# Altium PCB 28pins_PCB.PcbDoc (part 3 of 3)
Units mm, origin at the board's own origin, x right, y up, seen from the top; angles counter-clockwise.
Board outline 68.58 x 53.34 mm, 2 copper layers (L1, L2), stack 1.671 mm thick; 105 components, 73 nets, 323 pads, 83 vias.
Unrouted connection lines stored in the file: 1.
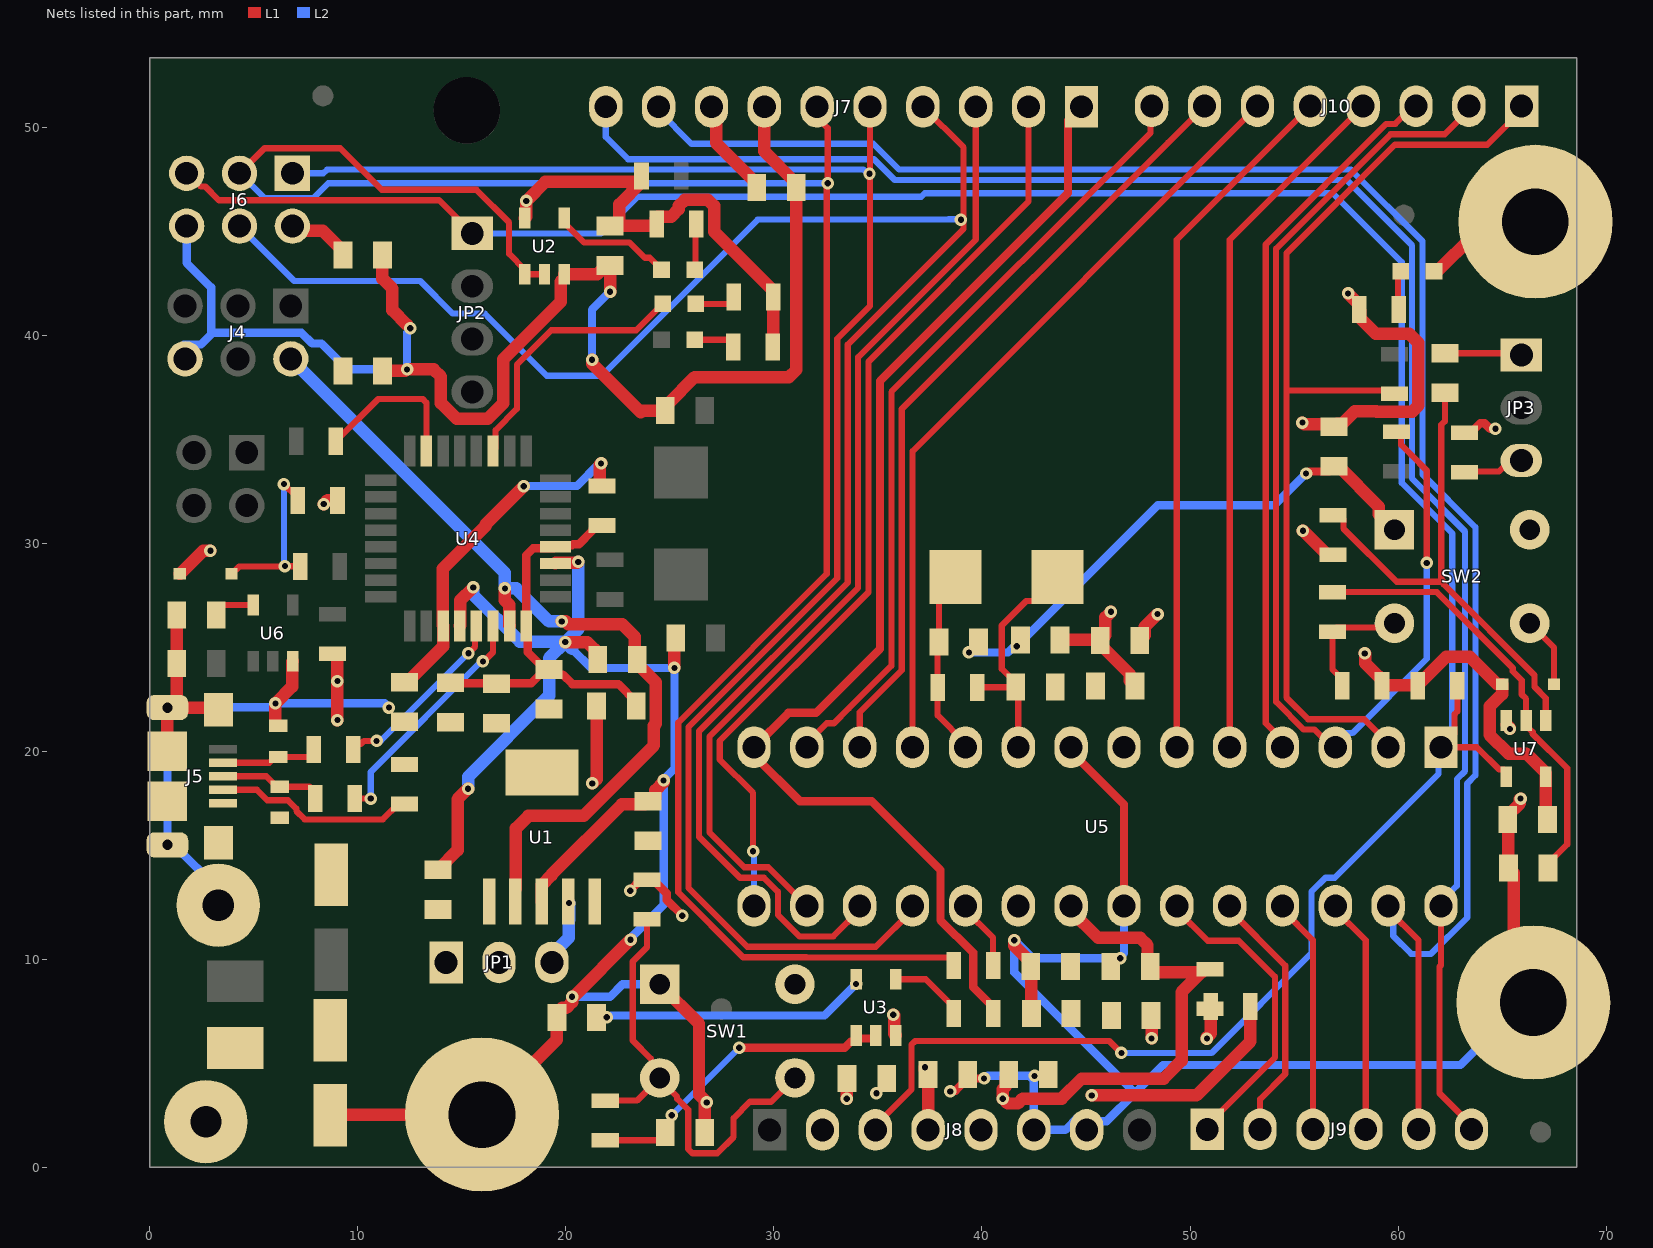
[diagram p2: the nets of this part, all layers, seen from the top]

## Via types
v1: diameter 0.6, hole 0.3, L1 to L2, 83 vias

## Nets (pads, with @x,y where several pads share a name; then routed paths per layer and width w, separated by ;. In a path a pad name is that pad's centre, name@x,y a point inside that pad or via, vN(x,y) a via of type N, cw(c..) or ccw(c..) an arc to the next point about the centre after c; other vN are vias at no path point) (continued)
16U_SCLK_R: R12.1 U4.15 | length 7.6
  L1 w0.3: R12.1@8.951,34.9 10.983,36.932 13.124,36.932 13.3,36.756 U4.15@13.3,34.425
16U_TX_LED: D2.1 U4.11 | length 12.8
  L1 w0.3: U4.11@16.5,34.425 16.625,34.55 16.625,35.437 17.65,36.462 17.65,38.58 19.304,40.234 23.384,40.234 D2.1@24.65,41.5
328P_16MHz_XTAL1: C29.2 R23.1 U5.9 Y2.1 | length 11.7
  L1 w0.3: R23.1@39.765,23.075 41.606,23.075 C29.2@41.62,23.089 ; U5.9@41.745,20.193 41.745,22.964 C29.2@41.62,23.089 ; Y2.1@43.623,28.372 43.623,28.322 42.523,27.222 42.127,27.222 40.95,26.045 40.95,23.959 41.62,23.289 C29.2@41.62,23.089
328P_16MHz_XTAL2: C28.2 R23.2 U5.10 Y2.2 | length 9.1
  L1 w0.3: Y2.2@38.723,28.372 37.937,27.586 C28.2@37.937,25.248 37.865,25.176 R23.2@37.865,23.075 37.865,21.733 39.205,20.393 U5.10@39.205,20.193
328P_AUTORESETn: C14.2 R25.2 U7.1 | length 24.9
  L1 w0.3: R25.2@56.875,31.35 57.175,31.35 57.375,31.15 57.375,30.705 59.93,28.15 62.067,28.15 62.195,28.022 ; C14.2@62.25,37.225 62.25,35.866 62.075,35.691 62.075,28.27 62.195,28.15 62.195,28.022 ; U7.1@67.1,21.475 67.1,22.554 66.553,23.1 66.553,23.663 62.195,28.022
328P_BUF_RESETn: C33.2 R28.2 U7.2 | length 21.2
  L1 w0.3: R28.2@56.85,27.65 61.86,27.65 65.507,24.003 65.507,23.851 65.938,23.419 65.938,22.728 66.15,22.516 66.15,21.25 66.475,20.925 66.475,20.83 68.123,19.182 68.123,15.523 67.2,14.6 C33.2@67.2,14.4
328P_RESETn: J6.5 J8.3 JP2.1 R22.2 U5.1 U7.4 | length 131.7
  L1 w0.3: 2.438,47.168 2.464,47.142 2.667,47.142 3.327,46.482 13.908,46.482 JP2.1@15.5,44.89 ; J8.3@34.874,1.803 34.874,2.003 36.611,3.74 36.611,5.899 36.787,6.075 46.125,6.075 v1(46.7,5.5) ; R22.2@62.85,23.15 62.85,21.914 62.715,21.779 62.715,20.843 U5.1@62.065,20.193 63.782,20.193 64.85,19.125 65.075,19.125 65.2,19 U7.4@65.2,18.775
  L2 w0.3: JP2.1@15.5,44.89 21.679,44.89 23.444,46.655 37.077,46.655 37.246,46.825 56.858,46.825 60.171,43.512 60.171,32.899 62.6,30.47 62.6,20.728 U5.1@62.065,20.193 ; v1(46.7,5.5) 51.037,5.5 55.835,10.298 55.835,13.249 56.509,13.923 56.951,13.923 60.728,17.7 61.946,18.919 61.946,19.939 U5.1@62.2,20.193
+3V3: C3.2 C23.2 J8.4 JP1.3 R8.2 U1.4 U1.5 | length 16.6
  L1 w0.6: v1(37.261,4.815) 37.261,4.698 37.413,4.546 37.413,1.805 J8.4@37.414,1.803 ; v1(45.275,3.462) 50.308,3.462 52.9,6.054 R8.2@52.9,7.725
  L2 w0.6: JP1.3@19.33,9.85 19.33,10.23 20.135,11.035 20.135,11.885 20.155,11.905 v1(20.155,12.705)
+3V3_16U2_UCAP: C13.2 R10.1 U4.27 | length 17.3
  L1 w0.6: C13.2@12.249,23.314 12.449,23.314 12.599,23.464 12.599,23.535 14.1,25.036 U4.27@14.1,26.025 14.075,26.05 14.075,26.686 14.075,28.761 16.15,30.836 16.15,30.907 v1(17.983,32.741) ; v1(21.692,33.833) 21.63,33.771 21.63,32.801 21.68,32.751 R10.1@21.742,32.751
  L2 w0.4: v1(17.983,32.741) 17.992,32.75 20.538,32.75 21.582,33.795 21.653,33.795 v1(21.692,33.833)
+5V: C4.2 C9.2 C10.2 C12.1 C21.2 C27.2 J2.1 J4.2 J8.5 JP1.1 L1.2 R7.1 U1.1 U1.2 U4.31 U5.21 | length 65.4
  L1 w0.6: J2.1@2.504,2.229 J2.1@2.504,2.53 ; v1(17.075,27.825) 17.075,27.248 17.275,27.048 17.275,26.686 17.275,26.05 U4.31@17.3,26.025 ; U1.2@17.6,13.4 17.6,16.3 18.2,16.9 20.85,16.9 24.228,20.278 24.228,21.217 24.328,21.317 24.328,23.31 23.305,24.334 23.305,25.514 22.708,26.111 20.12,26.111 19.993,26.238 v1(19.8,26.238) ; C21.2@41.286,4.465 41.136,4.315 41.136,3.9 41,3.764 v1(41,3.3) 41.228,3.072 41.725,3.072 41.956,3.303 43.831,3.303 44.79,4.262 48.725,4.262 49.6,5.137 49.6,8.43 50.558,9.388 48.242,9.388 48.092,9.538 C27.2@48.092,9.648 47.955,9.785 47.955,10.684 47.601,11.038 45.582,11.038 44.285,12.335 U5.21@44.285,12.573
  L2 w0.6: J4.2@6.782,38.862 17.075,28.569 v1(17.075,27.825) 17.616,27.825 19.202,26.238 v1(19.8,26.238)
+5V/3V3: C2.2 C17.2 C22.2 C24.2 C31.2 D5.1 D6.1 FB1.1 FB2.1 FB3.1 J6.2 J8.2 JP1.2 R1.2 R2.1 R5.2 R6.2 R7.2 R8.1 R9.2 R11.1 R20.2 R22.1 R24.1 R25.1 R26.1 U2.5 U7.5 | length 78.8
  L1 w0.4: v1(23.1,13.298) 23.1,13.325 23.6,13.825 R2.1@23.9,13.825 24.2,13.825 24.85,13.175 24.85,12.85 v1(25.6,12.1)
  L1 w0.6: D5.1@1.448,28.524 1.46,28.524 2.578,29.642 v1(2.921,29.642) ; J6.2@6.858,45.237 7.077,45.019 8.308,45.019 9.286,44.04 C17.2@9.286,43.84 ; v1(8.365,31.882) 8.548,32.065 8.88,32.065 R24.1@8.915,32.029 ; R11.1@8.788,24.679 9.088,24.679 9.025,24.615 v1(9.025,23.375) v1(9.025,21.5) ; U2.5@18.025,45.625 18.1,45.7 v1(18.1,46.45) 19.021,47.371 23.487,47.371 R9.2@23.637,47.521 ; v1(21.272,18.453) 21.478,18.66 FB1.1@21.478,22.174 ; C2.2@22.125,45.25 C2.2@22.325,45.25 ; R9.2@23.637,47.65 R9.2@23.637,47.521 ; R1.2@24.275,45.15 24.275,45.25 22.575,45.25 C2.2@22.325,45.25 ; R1.2@24.325,45.15 24.325,45.6 24.425,45.7 25.074,45.7 25.425,46.051 25.425,46.207 25.718,46.5 26.832,46.5 27.125,46.207 27.125,44.975 29.925,42.175 29.925,41.875 R5.2@29.975,41.825 29.963,41.812 29.963,39.438 R6.2@29.95,39.425 ; v1(33.5,3.3) 33.509,3.309 33.509,4.258 C22.2@33.518,4.267 ; FB2.1@47.584,25.324 47.834,25.574 47.834,25.99 v1(48.438,26.594) ; FB3.1@48.125,7.3 48.15,7.275 v1(48.15,6.2) ; v1(50.809,6.191) 50.809,6.245 51,6.437 R8.1@51,7.725 ; v1(55.4,35.8) 55.484,35.716 56.809,35.716 C24.2@56.925,35.6 57.075,35.75 57.315,35.75 57.918,36.352 58.941,36.352 58.968,36.325 60.682,36.325 60.975,36.618 60.975,39.632 60.532,40.075 58.923,40.075 58.175,40.823 58.175,41.175 R20.2@58.125,41.225 58.125,41.525 58.075,41.575 58.023,41.575 v1(57.597,42.001) ; v1(55.423,30.602) 56.575,29.45 R25.1@56.875,29.45 ; v1(58.4,24.7) 58.412,24.688 58.412,24.239 59.051,23.6 59.075,23.6 59.225,23.45 R26.1@59.225,23.15 59.238,23.163 R22.1@60.937,23.163 ; R22.1@60.95,23.15 R22.1@60.937,23.163 ; D6.1@64.993,23.225 64.993,22.75 64.4,22.157 64.4,20.793 65.309,19.884 66.166,19.884 67.1,18.95 67.1,16.8 C31.2@67.175,16.725 ; D6.1@65.006,23.225 64.757,23.225 63.432,24.55 62.324,24.55 R22.1@60.937,23.163 ; C2.2@22.325,45.25 22.575,45.5 22.575,46.288 23.637,47.35 R9.2@23.637,47.521
+5V/3V3_16U2: C6.2 C7.2 C8.2 FB1.2 R10.2 U4.4 U4.32 | length 20
  L1 w0.4: C8.2@14.449,23.289 14.47,23.268 16.642,23.268 C7.2@16.663,23.247 16.691,23.275 18.342,23.275 19,23.933 18.175,24.758 18.175,25.95 U4.32@18.1,26.025 18.1,29.425 18.425,29.75 19.425,29.75 19.575,29.9 20.3,29.9 20.35,29.95 20.633,29.95 21.292,30.609 21.292,30.701 21.442,30.851 R10.2@21.742,30.851 ; C6.2@19.2,23.933 19.45,23.683 19.853,23.683 20.311,23.224 22.528,23.224 23.378,22.374 FB1.2@23.378,22.174
+5V/3V3_328P_AVCC: C25.2 C26.2 FB3.2 U5.20
+5V/3V3_328P_VCC: C19.2 C20.2 FB2.2 U5.7 | length 6.6
  L1 w0.6: C19.2@43.749,25.349 45.659,25.349 FB2.2@45.684,25.324 ; v1(46.2,26.7) 45.934,26.434 45.934,25.574 FB2.2@45.684,25.324 ; C20.2@47.356,22.939 C20.2@47.356,23.139 47.106,23.389 47.106,23.702 45.684,25.124 FB2.2@45.684,25.324
+AREF: C18.2 J7.8 | length 4.8
  L1 w0.6: J7.8@27,50.978 27.224,50.754 27.224,49.242 29.174,47.292 C18.2@29.174,47.092
AD0: J9.1 U5.23 | length 14.9
  L1 w0.3: U5.23@49.365,12.573 49.365,12.373 50.846,10.892 52.345,10.892 54.077,9.16 54.077,5.28 50.825,2.029 J9.1@50.825,1.829
AD1: J9.2 U5.24 | length 12.4
  L1 w0.3: U5.24@51.905,12.573 51.905,12.373 54.577,9.701 54.577,4.49 53.365,3.279 J9.2@53.365,1.829
AD2: J9.3 U5.25 | length 11.3
  L1 w0.3: U5.25@54.445,12.573 54.445,12.373 55.905,10.913 J9.3@55.905,1.829
AD3: J9.4 U5.26 | length 11.3
  L1 w0.3: U5.26@56.985,12.573 56.985,12.373 58.445,10.913 J9.4@58.445,1.829
AD4/SDA: J7.9 J9.5 U5.27 | length 90.8
  L1 w0.3: U5.27@59.525,12.573 59.525,12.373 60.985,10.913 J9.5@60.985,1.829
  L2 w0.3: J7.9@24.46,50.978 24.46,50.778 26.038,49.2 34.772,49.2 36.017,47.955 57.73,47.955 61.171,44.514 61.171,33.313 63.715,30.77 63.715,18.841 63.325,18.451 63.325,12.007 61.58,10.262 60.63,10.262 59.768,11.123 59.768,12.33 U5.27@59.525,12.573
AD5/SCL: J7.10 J9.6 U5.28 | length 87
  L1 w0.3: U5.28@62.065,12.573 62.065,9.718 61.99,9.643 61.99,3.564 63.525,2.029 J9.6@63.525,1.829
  L2 w0.3: J7.10@21.92,50.978 21.92,49.528 22.993,48.455 34.81,48.455 35.81,47.455 57.523,47.455 60.671,44.307 60.671,33.106 63.215,30.563 63.215,19.048 62.825,18.658 62.825,13.533 62.065,12.773 U5.28@62.065,12.573
BUTTON_RESETn: D6.2 R26.2 R28.1 SW2.3 SW2.4 | length 9.3
  L1 w0.3: R26.2@57.325,23.15 57.325,23.45 56.85,23.925 R28.1@56.85,25.75 57.05,25.95 59.625,25.95 SW2.3@59.825,26.15 ; SW2.4@66.325,26.15 67.495,24.98 D6.2@67.495,23.225
CON_USB_N: J5.2 R13.1 Z2.2 | length 5
  L1 w0.3: J5.2@3.53,19.45 5.75,19.45 6.025,19.725 Z2.2@6.175,19.725 7.724,19.725 7.899,19.901 7.899,20.244 7.823,20.32 R13.1@7.823,20.345
CON_USB_P: J5.3 R15.1 Z1.2 | length 5
  L1 w0.3: J5.3@3.53,18.8 5.6,18.8 6.1,18.3 Z1.2@6.25,18.3 7.675,18.3 7.95,18.025 R15.1@7.95,17.725
GND: C1.1 C2.1 C3.1 C4.1 C5.1 C6.1 C7.1 C8.1 C9.1 C10.1 C11.2 C12.2 C13.1 C15.1 C16.1 C17.1 C18.1 C19.1 C20.1 C21.1 C22.1 C23.1 C24.1 C25.1 C26.1 C27.1 C28.1 C29.1 C30.1 C31.1 C32.1 C33.1 D4.1 J1.1 J4.6 J5.5 J5.6 J5.7 J5.8 J5.9 J5.10 J5.11 J6.6 J7.7 J8.6 J8.7 MH1.1 MH2.1 MH3.1 R14.2 R19.1 SW1.1 SW1.2 SW2.1 SW2.2 U1.3 U1.6 U2.3 U3.3 U4.3 U4.28 U5.8 U5.22 U6.3 U7.3 Z1.1 Z2.1 | length 306.1
  L1 w0.4: v1(38.475,3.65) 38.513,3.688 38.734,3.688 39.311,4.265 C23.1@39.311,4.465 39.502,4.275 v1(40.1,4.275) ; U5.8@44.285,20.193 44.285,19.993 46.825,17.453 U5.22@46.825,12.573 ; v1(55.575,33.35) 55.629,33.35 55.729,33.45 56.675,33.45 C24.1@56.925,33.7 ; R19.1@63.195,35.316 63.495,35.316 63.941,35.762 64.163,35.762 64.425,35.5 v1(64.675,35.5)
  L1 w0.6: J5.10@0.855,20 J5.8@0.855,22.1 J5.8@1.092,22.1 ; C30.1@1.3,26.55 C32.1@1.3,24.225 1.298,24.223 1.298,22.305 J5.8@1.092,22.1 ; J5.6@3.305,22 3.205,22.1 J5.8@1.092,22.1 ; Z2.1@6.175,21.225 6.045,21.355 v1(6.045,22.301) 6.85,23.106 6.85,24.3 U6.3@6.875,24.325 ; C12.2@8.675,2.5 8.715,2.54 MH1.1@15.97,2.54 19.573,6.143 C1.1@19.573,7.214 19.573,7.414 19.823,7.664 20.023,7.664 20.3,7.94 v1(20.3,8.2) 20.367,8.2 v1(23.114,10.947) ; C10.1@11.186,38.278 12.294,38.278 v1(12.37,38.354) 13.649,38.354 14,38.003 14,36.732 14.762,35.97 16.238,35.97 17,36.732 17,38.849 19.75,41.599 19.75,42.575 U2.3@19.9,42.725 ; C17.1@11.186,43.84 11.186,42.713 11.659,42.24 11.659,41.199 v1@12.37,40.488 ; C4.1@13.85,14.3 14.8,15.25 14.8,17.7 v1(15.3,18.2) ; U4.28@14.9,26.025 14.925,26.05 14.925,26.686 14.925,27.25 v1(15.55,27.875) ; U1.3@18.85,12.775 18.85,13.575 19.32,14.045 19.32,14.082 22.688,17.45 23.8,17.45 C3.1@23.95,17.6 ; U4.3@19.5,29.025 19.525,29.05 20.55,29.05 v1(20.6,29.1) ; U2.3@19.925,42.925 21.5,42.925 21.925,43.35 C2.1@22.125,43.35 v1(22.125,42.089) ; v1(19.975,25.25) 21.028,25.25 21.379,24.899 21.379,24.559 C9.1@21.529,24.409 ; v1(21.26,38.811) 21.26,38.633 23.597,36.297 23.673,36.373 C16.1@24.78,36.373 24.78,36.573 24.93,36.723 26.186,37.978 30.723,37.978 31.074,38.33 C18.1@31.074,47.092 31.074,47.292 29.54,48.826 J7.7@29.54,50.978 ; C3.1@24.15,17.6 24.3,17.75 24.3,18.119 24.7,18.519 v1(24.7,18.6) ; SW1.1@24.512,8.803 26.4,6.915 26.4,3.5 v1(26.775,3.125) 26.68,3.03 C5.1@26.68,1.676 ; v1(25.222,24.003) 25.222,25.385 C15.1@25.288,25.451 ; SW1.2@31.012,8.803 SW1.2@31.061,8.803 ; v1(35.738,7.341) 35.776,7.302 35.776,6.42 U3.3@35.85,6.346 ; v1(41.554,10.922) 41.554,10.646 42.35,9.85 C26.1@42.35,9.65 42.363,9.638 42.363,7.413 C25.1@42.375,7.4 ; C24.1@56.925,33.7 57.125,33.7 59.075,31.75 59.075,31.4 SW2.1@59.825,30.65 ; D4.1@61.825,43 63.688,44.863 65.529,44.863 MH2.1@66.04,45.374 ; U7.3@65.225,21.275 65.375,21.125 v1(65.375,21.072) ; v1(65.888,17.729) 65.849,17.691 65.849,17.499 65.275,16.925 C31.1@65.275,16.725 65.288,16.713 65.288,14.412 C33.1@65.3,14.4 65.55,14.15 65.55,8.456 MH3.1@66.04,7.966
  L2 w0.4: J4.6@1.651,39.532 1.671,39.552 2.468,39.552 2.952,40.036 ; J6.6@1.778,45.237 1.778,43.472 2.952,42.298 2.952,40.036 ; 2.883,39.967 2.952,40.036 ; J1.1@3.3,12.6 3.3,13.368 1.168,15.5 J5.9@0.855,15.5 J5.8@0.855,22.1 0.865,22.11 5.854,22.11 v1(6.045,22.301) 11.299,22.301 v1(11.5,22.1) ; v1(12.522,40.335) 12.522,40.281 12.37,40.129 v1(12.37,38.354) 9.5,38.354 8.255,39.599 7.813,39.599 7.3,40.112 3.028,40.112 2.952,40.036 ; MH1.1@15.763,2.332 MH1.1@15.97,2.54 ; v1(20.3,8.2) 22.123,8.2 22.726,8.803 SW1.1@24.512,8.803 ; 20.3,24.925 21.222,24.003 v1(25.222,24.003) 25.222,19.176 24.7,18.654 v1(24.7,18.6) 24.7,12.61 v1@22.936,10.846 ; v1(21.26,38.811) 21.26,41.224 v1(22.125,42.089) ; v1(39.375,24.75) 41.25,24.75 41.849,25.349 ; v1(40.1,4.275) 40.154,4.275 40.279,4.4 v1(42.525,4.4) ; v1(41.675,25.05) 48.45,31.825 54.05,31.825 v1(55.575,33.35) ; v1@42.397,4.272 42.494,4.174 J8.6@42.494,1.803 44.003,1.803 J8.7@44.619,2.419 ; U5.8@44.285,20.193 U5.8@44.285,20.714 ; J8.7@45.034,1.803 45.452,2.221 45.996,2.221 47.348,3.573 ; U5.22@46.711,12.687 U5.22@46.825,12.573 46.825,10.288 46.65,10.113 v1(46.65,10.058) 42.418,10.058 v1(41.554,10.922) 41.554,9.367 47.348,3.573 ; MH3.1@66.04,7.966 62.999,4.925 48.7,4.925 47.348,3.573 ; MH2.1@66.04,45.374 MH2.1@67.325,44.089
  L2 w0.6: v1(15.3,18.2) 15.3,18.775 19.2,22.675 19.2,24.475 v1(19.975,25.25) ; v1(15.55,27.875) 15.55,27.521 17.796,25.275 19.95,25.275 v1(19.975,25.25) ; 20.3,24.925 v1(19.975,25.25) ; v1(20.6,29.1) 20.6,25.875 v1(19.975,25.25)
  other v1: 34.925,3.567
IO0: J10.1 R16.2 U5.2 | length 47
  L1 w0.3: U5.2@59.525,20.193 59.525,20.393 58.375,21.543 55.673,21.543 54.635,22.581 54.635,37.338 ; R16.2@59.825,37.175 59.662,37.338 54.635,37.338 ; J10.1@65.938,51.003 65.938,50.803 64.288,49.153 59.847,49.153 54.635,43.942 54.635,37.338
IO1: J10.2 R18.2 U5.3 | length 56
  L1 w0.3: U5.3@56.71,20.668 56.684,20.642 56.384,20.642 55.983,21.043 55.466,21.043 54.135,22.373 54.135,44.149 59.639,49.653 62.239,49.653 63.201,50.616 63.398,50.813 J10.2@63.398,51.003 ; R18.2@59.925,35.35 59.944,35.35 60.144,35.15 60.144,34.726 60.622,34.247 61.375,33.495 v1(61.375,29.05)
  L2 w0.3: U5.3@57.15,19.837 57.15,20.578 56.849,20.879 57.81,20.879 61.375,24.443 v1(61.375,29.05)
IO2: J10.3 U5.4 | length 34.5
  L1 w0.3: U5.4@54.445,20.193 54.445,20.542 53.635,21.351 53.635,44.356 59.432,50.153 59.857,50.153 60.707,51.003 J10.3@60.858,51.003
IO3: J10.4 U5.5 | length 33.5
  L1 w0.3: U5.5@51.905,20.193 51.905,44.59 J10.4@58.318,51.003
IO4: J10.5 U5.6 | length 33.5
  L1 w0.3: U5.6@49.365,20.193 49.365,44.59 J10.5@55.778,51.003
IO5: J10.6 U5.11 | length 37.7
  L1 w0.3: U5.11@36.665,20.193 36.665,34.43 J10.6@53.238,51.003
IO6: J10.7 U5.12 | length 37.7
  L1 w0.3: U5.12@34.125,20.193 34.125,21.873 36.146,23.894 36.146,36.45 48.946,49.251 J10.7@50.698,51.003
IO7: J10.8 U5.13 | length 37.9
  L1 w0.3: U5.13@31.585,20.193 31.585,20.393 32.536,21.344 32.889,21.344 33.604,22.06 35.646,24.101 35.646,37.271 48.104,49.729 48.104,50.949 J10.8@48.158,51.003
IO8: J7.1 R3.2 U5.14 | length 57.7
  L1 w0.4: R3.2@40.549,7.391 40.549,7.691 39.573,8.667 39.573,10.329 38.853,11.049 38.837,11.049 38.713,11.173 38.708,11.173 38.005,11.876 38.005,14.294 34.696,17.602 31.242,17.602 29.045,19.799 U5.14@29.045,20.193 30.696,21.844 32.024,21.844 35.096,24.916 35.096,37.796 44.13,46.83 44.13,50.328 J7.1@44.78,50.978
IO9: J7.2 U5.15 | length 45.2
  L1 w0.3: v1(29,15.2) 29,18 27.4,19.6 27.4,20.5 34.546,27.646 34.546,38.731 42.24,46.426 J7.2@42.24,50.978
  L2 w0.3: v1(29,15.2) 29.045,15.155 U5.15@29.045,12.573
MISO: J6.1 J7.5 U5.18 | length 81.9
  L1 w0.3: v1(34.594,47.752) 34.62,47.726 34.62,41.402 33.046,39.827 33.046,28.317 25.9,21.172 25.9,13.426 28.723,10.603 34.895,10.603 36.665,12.373 U5.18@36.665,12.573 ; v1@34.62,47.752 J7.5@34.62,50.978
  L2 w0.3: J6.1@6.858,47.777 8.346,47.777 8.524,47.955 34.31,47.955 34.513,47.752 v1(34.594,47.752)
MOSI: J6.4 J7.4 U5.17 | length 93.6
  L1 w0.3: U5.17@34.125,12.573 34.125,12.373 32.855,11.103 31.228,11.103 30.195,12.137 30.195,13.249 29.521,13.923 28.37,13.923 26.4,15.893 26.4,20.964 33.546,28.11 33.546,39.544 39.116,45.114 39.116,45.542 39.116,49.022 J7.4@37.16,50.978
  L2 w0.3: J6.4@4.318,45.237 6.953,42.602 12.998,42.602 14.564,41.036 16.1,41.036 19.087,38.049 21.721,38.049 29.227,45.555 38.392,45.555 38.402,45.565 38.966,45.565 v1(38.989,45.542) ; J7.4@37.16,50.978 J7.4@37.16,51.53
NetC1_2: C1.2 U3.5 | length 12.6
  L2 w0.4: v1(21.971,7.214) 22.009,7.252 22.151,7.252 22.199,7.3 32.428,7.3 v1(33.95,8.821)
NetC14_1: C14.1 JP3.1 | length 3.7
  L1 w0.3: C14.1@62.25,39.125 65.85,39.125 JP3.1@65.925,39.05
NetC30_2: C30.2 U6.5 | length 2.1
  L1 w0.3: C30.2@3.2,26.55 3.2,26.725 3.5,27.025 U6.5@4.975,27.025
NetD1_1: D1.1 U2.4 | length 5.8
  L1 w0.3: U2.4@19.925,45.625 19.925,45.4 20.875,44.45 23.063,44.45 23.8,43.713 24.037,43.713 D1.1@24.6,43.15
NetD1_2: D1.2 R1.1 | length 2.2
  L1 w0.3: D1.2@26.2,43.15 26.238,43.187 26.238,45.313 R1.1@26.275,45.35
NetD2_2: D2.2 R5.1 | length 2
  L1 w0.3: D2.2@26.25,41.5 27.875,41.5 28.075,41.7 R5.1@28.075,41.825
NetD3_2: D3.2 R6.1 | length 2.1
  L1 w0.3: D3.2@26.2,39.775 27.85,39.775 28.05,39.575 R6.1@28.05,39.425
NetD4_2: D4.2 R20.1 | length 2
  L1 w0.3: D4.2@59.975,43.25 60,43.225 60,41.25 R20.1@60.025,41.225
NetD5_2: D5.2 R24.2 R27.1 | length 9.4
  L1 w0.3: D5.2@3.937,28.524 3.95,28.524 4.305,28.88 R27.1@7.239,28.88 7.219,28.9 v1(6.5,28.9) ; v1(6.452,32.842) 7.087,32.207 7.087,31.984 R24.2@7.191,31.879
  L2 w0.3: v1(6.452,32.842) 6.452,28.948 v1(6.5,28.9)
NetJ5_4: J5.4 R14.1 | length 9.7
  L1 w0.3: J5.4@3.53,18.15 5.155,18.15 5.655,17.65 6.645,17.65 7.05,17.245 7.05,17.13 7.455,16.725 11.203,16.725 11.943,17.465 R14.1@12.243,17.465
NetJP3_3: JP3.3 R19.2 | length 3
  L1 w0.3: R19.2@63.195,33.416 63.229,33.45 64.853,33.45 65.373,33.97 JP3.3@65.925,33.97
NetR3_1: R3.1 U3.4 | length 3.7
  L1 w0.3: U3.4@35.85,9.046 37.294,9.046 38.649,7.691 R3.1@38.649,7.391
SCK: J6.3 J7.6 R21.2 U2.1 U2.2 | length 103.5
  L1 w0.3: J6.3@4.318,47.777 5.518,48.977 9.163,48.977 11.159,46.982 15.703,46.982 17.272,45.412 17.272,43.903 18.025,43.15 U2.1@18.025,42.925 U2.2@18.975,42.925 ; J7.6@32.08,50.978 32.08,50.46 32.588,49.952 v1(32.588,47.305) 32.546,47.263 32.546,28.524 25.4,21.379 25.4,13.219 28.516,10.103 31.551,10.103 31.57,10.084 38.433,10.084 38.633,9.884 R21.2@38.633,9.703
  L2 w0.3: J6.3@4.318,47.777 4.324,47.777 5.524,46.577 6.296,46.577 7.853,46.577 8.581,47.305 v1(32.588,47.305)
SCK_R: R21.1 U5.19 | length 3.4
  L1 w0.3: U5.19@39.205,12.573 39.205,12.373 40.533,11.045 R21.1@40.533,9.703
SS: J7.3 U5.16 | length 46.3
  L1 w0.3: U5.16@31.585,12.573 31.578,12.573 29.728,14.423 28.577,14.423 26.9,16.1 26.9,20.707 34.046,27.853 34.046,38.938 39.7,44.593 J7.3@39.7,50.978
USB_N: R13.2 U4.29 | length 9
  L1 w0.3: R13.2@9.789,20.091 10.094,20.396 10.145,20.345 10.299,20.5 v1(10.902,20.5) ; v1(15.319,24.714) 15.638,25.033 15.638,25.963 U4.29@15.7,26.025
  L2 w0.3: v1(10.902,20.5) 11.105,20.5 v1(15.319,24.714)
USB_P: R15.2 U4.30 | length 11.6
  L1 w0.3: R15.2@9.85,17.725 v1(10.621,17.725) v1@10.643,17.704 ; v1(16.013,24.317) 16.067,24.317 16.5,24.75 U4.30@16.5,26.025
  L2 w0.3: v1(10.621,17.725) 10.621,19.003 15.935,24.317 v1(16.013,24.317)
USER_BUTTON: R2.2 R4.1 SW1.3 SW1.4 | length 21.4
  L1 w0.3: R4.1@21.895,3.211 23.42,3.211 24.29,4.081 24.671,4.081 25.346,3.406 25.346,3.305 25.88,2.771 25.88,0.881 26.085,0.676 27.275,0.676 28.062,1.463 28.062,2.366 28.849,3.153 29.862,3.153 SW1.4@31.012,4.303 ; R2.2@23.9,11.925 23.9,10.586 23.212,9.898 23.212,6.099 24.079,5.232
USER_BUTTON_BUF: C5.2 R4.2 U3.1 U3.2 | length 14.4
  L1 w0.3: R4.2@21.895,1.311 24.48,1.311 24.78,1.611 C5.2@24.78,1.676
  L1 w0.4: v1(28.331,5.75) 33.4,5.75 33.696,6.046 33.875,6.046 33.95,6.121 U3.1@33.95,6.346 ; U3.1@33.95,6.194 U3.2@34.696,6.194
  L2 w0.3: v1(25.085,2.505) v1(28.331,5.75)
pads on no net: FIT1.1 FIT2.1 FIT3.1 FIT4.1 J8.1 J8.8 MH4.1 U4.5 U4.6 U4.7 U4.12 U4.14 U4.22 U4.23 U4.25 U4.26

## Polygon pours and split planes (outlines as drawn)
GND on L2 "GND_L02_P029" (solid, remove dead copper, pour order 29): 63.525,52.875 68.2,52.875 68.2,4.425 67.775,4 67.55,4.225 63.525,4.225
+3V3 on L2 "+3V3_L02_P026" (solid, remove dead copper, pour order 26): 47.056,3.025 36.757,3.025 36.807,8.7 18.464,8.7 18.464,11.2 20.8,11.2 38.881,11.2
+5V/3V3 on L2 "+5V/3V3_L02_P010" (solid, remove dead copper, pour order 10): 8.6,49.3 8.6,44.2 0.8,44.2 0.8,33.4 10.3,33.4 10.3,19.1 51.6,19.1 51.6,5.8 45.575,5.8 45.575,11.444 18.3,11.7 18.3,8.7 20.1,6.9 34.175,7.03 34.175,0.8 24.288,0.8 14.488,11.5 0.4,11.5 0.2,27.1 0.2,49.3
GND on L2 "GND_L02_P007" (solid, remove dead copper, pour order 7): 28.6,52.6 28.6,49.5 67.7,49.5 67.8,49.6 67.8,52.7 28.7,52.7
+5V/3V3 on L2 "+5V/3V3_L02_P005" (solid, remove dead copper, pour order 5): 18.71,46.9 18.71,45.4 18.81,45.3 17.21,45.3 17.21,46.2 8.61,46.2 8.61,44.3 6.21,44.3 4.81,45.7 4.81,46.9
+5V/3V3 on L2 "+5V/3V3_L02_P002" (solid, remove dead copper, pour order 2): 58.8,42.3 54.9,42.3 54.9,27.2 48.1,27.2 48.1,5.9 58.8,5.9
+5V on L2 "+5V_L02_P000" (solid, remove dead copper, pour order 0): 0.3,10.982 13,10.982 15.1,10.982 24.5,0.5 38.675,0.5 39.3,3.9 41.5,3.9 41.5,0.2 0.3,0.2
GND on L2 "GND_L02_P013" (solid, remove dead copper, pour order 13): 23.7,9.75 23.75,9.7 34.95,9.7 34.95,7.7 36.425,7.7 36.425,4.05 36.4,4.025 36.475,3.95 38.18,3.95 38.18,4.808 39.95,4.808 39.95,3.2 34.8,3.2 34.575,3.2 34.575,3.825 34.575,7.225 23.6,7.225 23.575,7.2 23.575,9.625
5V_USB on L2 "5V_USB_L02_P001" (solid, remove dead copper, pour order 1): 4.3,14.9 5.6,13.7 5.6,11.4 6.612,11.4 6.5,20.7 4.3,20.7
+5V/3V3_328P_VCC on L2 "+5V/3V3_328P_VCC_L02_P011" (solid, remove dead copper, pour order 11): 45.8,27.2 47.8,27.2 47.8,19.2 45.8,19.2
+5V/3V3_328P_AVCC on L1 "+5V/3V3_328P_AVCC_L01_P025" (solid, remove dead copper, pour order 25): 40.9,13.675 40.925,13.65 42.7,13.65 42.7,12.475 44.925,10.425 44.888,8.15 46.825,8.15 46.825,6.55 43.5,6.55 43.45,6.55 43.45,9.775 41.725,11.5 40.925,11.5
GND on L1 "GND_L01_P023" (solid, remove dead copper, pour order 23): 41.419,25.95 42.65,25.95 42.65,25.2 44.1,23.75 45.75,23.75 45.75,21.9 45.75,19.2 42.775,19.2 42.775,23.4 41.419,24.7
+5V on L1 "+5V_L01_P014" (solid, remove dead copper, pour order 14): 0.4,7.1 6.9,7.1 6.9,8.1 10.1,8.1 10.1,5.1 6.2,5.1 6.2,0.4 6.3,0.3 0.4,0.3
+5V on L1 "+5V_L01_P018" (solid, remove dead copper, pour order 18): 18.2,11.2 18.1,11.1 15.4,11.1 15.4,8.6 13.2,8.6 13.2,13.2 15.7,13.2 15.7,14.2 18.2,14.2
+5V on L1 "+5V_L01_P024" (solid, remove dead copper, pour order 24): 6.3,39.775 7.8,39.775 7.8,38.9 9.75,38.9 9.75,37.65 9.775,37.625 7.325,37.625 7.325,38.225 7.325,38.3 6.3,38.3
+3V3 on L1 "+3V3_L01_P016" (solid, remove dead copper, pour order 16): 24.7,16.3 24.7,15 22.3,15 22.3,11.6 19.641,11.6 19.7,11.659 19.7,13.7 21,13.7 21,15.1 22.2,16.3
GND on L1 "GND_L01_P019" (solid, remove dead copper, pour order 19): 0.36,27.075 2.36,27.075 2.36,22.775 2.46,22.675 4.16,22.675 4.16,20.675 3.96,20.675 2.36,20.675 2.36,17.7 4.9,17.7 9,15.393 15.36,15.393 15.36,13.275 5.26,13.275 5.26,10.775 5.16,10.675 0.26,10.675
GND on L1 "GND_L01_P020" (solid, remove dead copper, pour order 20): 11.2,22.5 20.2,22.5 20.2,17.7 20,17.5 14.9,17.5 14.9,18.8 11.2,18.8
5V_USB on L1 "5V_USB_L01_P015" (solid, remove dead copper, pour order 15): 9.8,8.5 6.2,8.5 6.2,7.6 0.4,7.6 0.4,10.1 5.6,10.1 5.6,12.3 9.8,12.3

## Silkscreen, mask and mechanical layers (free items; w line width, h text height)
Top Overlay:
  text "ICSP" at 2.275,49.6 h1
  text "U" at 27.35,43.225 h1
  text "ICSP1" at 2.125,42.825 h1
  text "TX" at 21.3,40.975 h1
  text "RX" at 21.35,39.375 h1
  text "KS BOARDS" at 33.825,38.25 h2
  text "www.ksboards.com" at 34.7,36.675 h1
  text "3" at 2,35.95 h1
  text "Arduino Uno trial" at 34.225,33.975 h1
  text "2" at 4.3,30.45 h1 r270
  text "4" at 1.725,30.425 h1 r270
  text "RESET" at 55,26.1 h1 r90
  text "14" at 27.775,22.3 h1
  text "5" at 51.525,22.175 h1
  text "28" at 60.975,9.8 h1
  text "USER" at 26.075,9.4 h1
Bottom Overlay:
  text "0" at 67.525,51.475 h1 r180
  text "1" at 63.85,49.15 h1 r90
  text "5~" at 53.525,49.125 h1 r90
  text "3~" at 58.7,49.1 h1 r90
  text "2" at 61.25,49.1 h1 r90
  text "6~" at 51.125,49.075 h1 r90
  text "4" at 56.225,49.025 h1 r90
  text "+AREF" at 27.55,49 h1 r90
  text "GND" at 29.875,48.875 h1 r90
  text "7" at 48.65,48.85 h1 r90
  text "AD5/SCL" at 22.3,48.75 h1 r90
  text "AD4/SDA" at 24.825,48.725 h1 r90
  text "13" at 32.475,48.7 h1 r90
  text "8" at 45.125,48.7 h1 r90
  text "12" at 34.9,48.65 h1 r90
  text "9~" at 42.675,48.6 h1 r90
  text "10~" at 40.05,48.575 h1 r90
  text "11~" at 37.5,48.55 h1 r90
  text "WWW.KSBOARDS.COM" at 44.575,44.8 h2 r90
  text "KS BOARDS" at 39.2,44.525 h2 r90
  text "+5V Input Power" at 7.592,14.675 h1 r90
  text "-" at 1.875,13.25 h2 r90
  text "+5V/3V3" at 32.9,10.225 h1 r90
  text "RESET" at 35.35,8.2 h1 r90
  text "3V3" at 38.025,6.275 h1 r90
  text "+5V" at 40.35,6.25 h1 r90
  text "GND" at 45.625,6.15 h1 r90
  text "GND" at 42.975,6.125 h1 r90
  text "+" at 2.233,5.475 h2 r90
  text "NC" at 30.275,5.4 h1 r90
  text "A0" at 51.05,5.1 h1 r90
  text "NC" at 48.125,5.05 h1 r90
  text "A4" at 61.425,5 h1 r90
  text "A5" at 63.85,5 h1 r90
  text "A2" at 56.15,4.975 h1 r90
  text "A3" at 58.8,4.975 h1 r90
  text "A1" at 53.6,4.725 h1 r90
Board Outline:
  the board outline again, w0.3
Mechanical Drawing:
  circle w1: c15.925,2.625 r1.95
  circle w1: c66.475,7.625 r1.95
  circle w1: c66.525,45.525 r1.95
  circle w1: c15.25,50.85 r1.95
  lines w2: -1.15,-0.875 -1.15,54.45 69.725,54.45 69.725,-0.875 -1.15,-0.875
  text "Mechanical Drawing Of Arduino" at -26.8,73.466 h5
  text ".VersionRevision" at 33.325,63.5 h5
  text "Units: Mils" at 18.375,-11.05 h3
Manufacturing Notes:
  text "**SOLDER RESIST: APPLY TO BOTH SIDES COLOR : GREEN" at -12,58.05 h2
  text "Manufacturing Files" at 76.325,52.991 h2
  text "--Gerber file for each layer" at 79.725,42.816 h2
  text "--Drilling Files" at 80.075,34.966 h2
  text "**No Panelization" at 79.75,28.05 h2
  text "www.ksboards.com" at 18.2,-18.95 h2
  text "Contact: Support@ksboards.com" at 5.35,-22.934 h2
ASM Top:
  text "Assembly top of arduino uno" at 10.875,67.116 h2
  text ".VersionRevision" at 65,67.05 h2
  text "(No variations)" at 27.125,62.05 h2

## Dimensions
-1.15,-0.875 to 68.725,-5.225 on Mechanical Drawing
-1.15,-0.875 to -5.425,53.475 on Mechanical Drawing

## Text inside footprints (layer, text, board x,y; h text height)
J3: Top Overlay "1" at 4.638,36.028 h0.6 r270
J4: Top Overlay "1" at 6.755,43.08 h0.6 r270
J6: Top Overlay "1" at 6.831,49.455 h0.6 r270
J7: Top Overlay "1" at 44.472,53.064 h1 r270
J8: Top Overlay "1" at 30.102,-0.283 h1 r90
J9: Top Overlay "1" at 51.133,-0.257 h1 r90
J10: Top Overlay "1" at 65.63,53.089 h1 r270
JP1: Top Overlay "1" at 14.558,7.764 h1 r90
JP2: Top Overlay "1" at 13.414,44.582 h1
JP3: Top Overlay "1" at 63.839,38.742 h1